# Altium PCB Flat Project.PcbDoc
Units mil, origin at the board's own origin, x right, y up, seen from the top; angles counter-clockwise.
Board outline 6000 x 4000 mil, 2 copper layers (Top Layer, Bottom Layer); 15 components, 15 nets, 132 pads, 6 vias.
Unrouted connection lines stored in the file: 40.
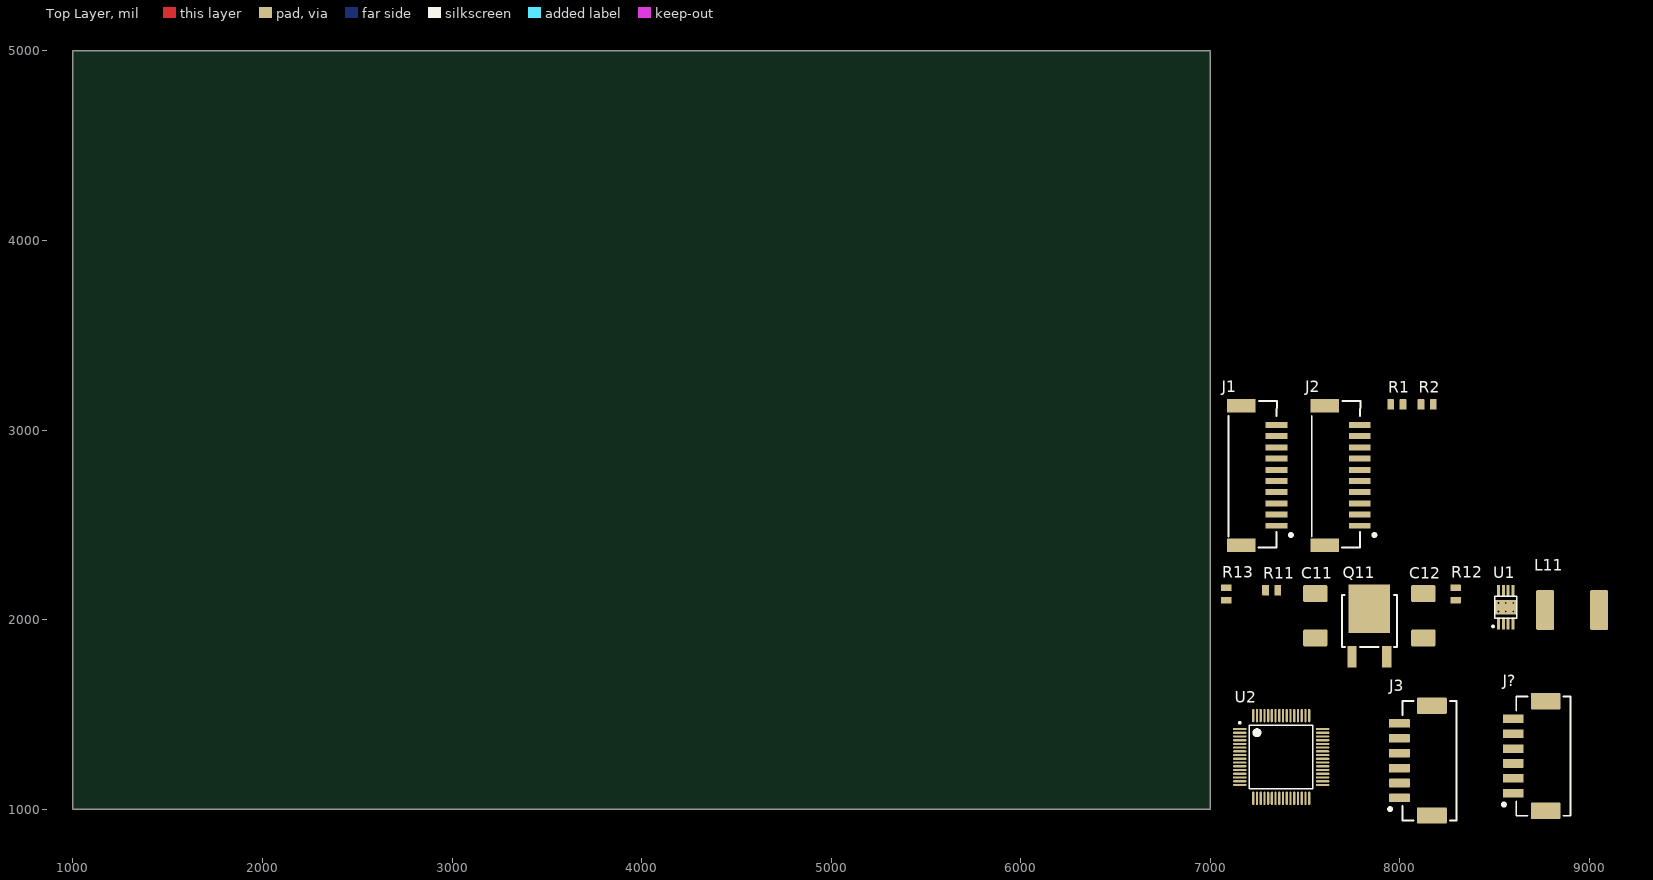
[diagram p0: Top Layer view]
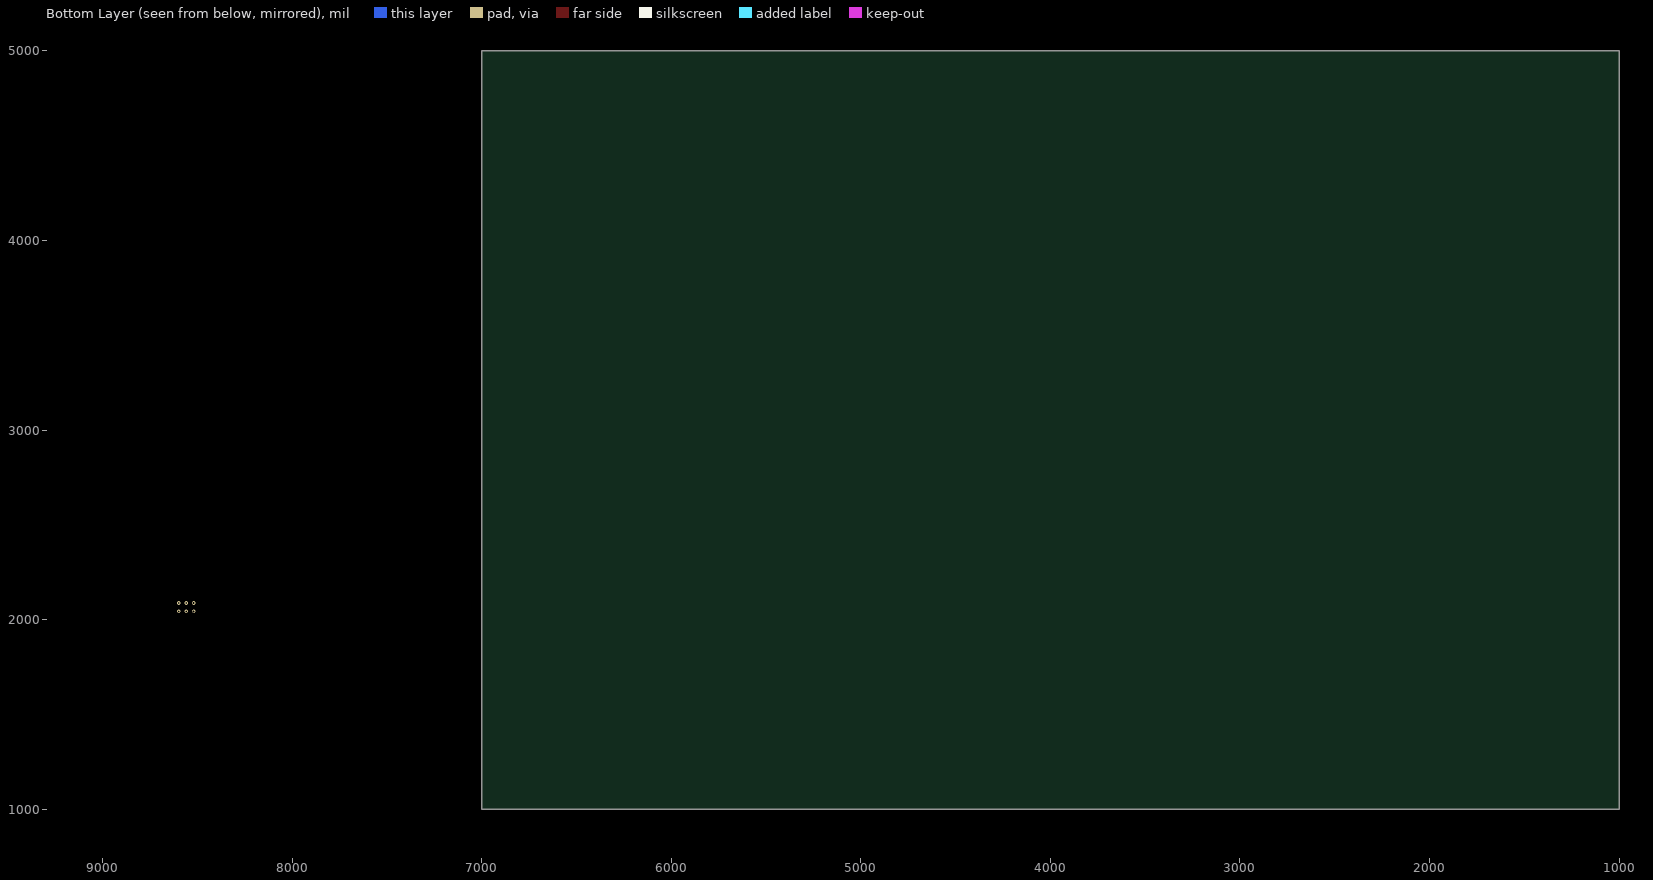
[diagram p1: Bottom Layer view, seen from below]

## Layer stack, top to bottom
Top Solder: solder mask 0.4, Solder Resist, Dk 3.5
Top Layer: signal copper 1.4
Dielectric 1: dielectric 12.6, FR-4, Dk 4.8
Bottom Layer: signal copper 1.4
Bottom Solder: solder mask 0.4, Solder Resist, Dk 3.5

## Board outline
1000,1000 7000,1000 7000,5000 1000,5000

## Design rules (kind name [scope] priority, off if disabled: settings)
Clearance [All] p1: gap=6 ignorepadtopadclearanceinfootprint=FALSE
PolygonConnect [All] p1: connectstyle=Relief reliefconductorwidth=10 reliefentries=4 polygonreliefangle="90 Angle" airgapwidth=10
RoutingVias [All] p1: holewidth=28 width=50 viastyle="Through Hole" minholewidth=28 minwidth=50 maxholewidth=28 maxwidth=50
SolderMaskExpansion [All] p1: expansion=4 istentingtop=FALSE
Width [All] p1: maxlimit=10 minlimit=10 preferedwidth=10
30 further rules are at their usual default settings.

## Classes and differential pairs
net class N000-1_[0..3]: GPIO_BUS0 GPIO_BUS1 GPIO_BUS2 GPIO_BUS3
component class "Net Names 2": J1 J2 J? R1 R2
component class "Net Names 1": C11 C12 J3 L11 Q11 R11 R12 R13 U1
component class Microcontroller: U2

## Components (designator, comment, footprint, x,y, rotation, side; value= is the part's Value field where it differs from the comment)
C11 "CAP_22uF_25V_TANT" CAP2917 7555,2020 r90 top value=22μF
C12 "CAP_22uF_25V_TANT" CAP2917 8125,2020 r90 top value=22μF
J1 "CON_10M_SM_RA" MOLEX-5025851070 7350,2495 r90 top
J2 "CON_10M_SM_RA" MOLEX-5025851070 7790,2495 r90 top
J3 "CON_6M_SM_RA" MOLEX-5024940670 8084.37,1255.63 r90 top
J? "CON_6M_SM_RA" MOLEX-5024940670 8685,1280 r90 top
L11 "IND_2.2uH_14.5A" IND_VISHAY_IHLP3232DZER2R2M11 8910,2050 r0 top
Q11 "PMOS_85V_96A" D-PAK 7840,1930 r0 top
R1 "RES_4.7kΩ_0805_5%" RES0805 7985,3135 r0 top value=4.7kΩ
R2 "RES_4.7kΩ_0805_5%" RES0805 8145,3135 r0 top value=4.7kΩ
R11 "RES_243kΩ_0805_1%" RES0805 7325,2155 r0 top value=243kΩ
R12 "RES_10kΩ_0805_5%" RES0805 8295,2135 r90 top value=10kΩ
R13 "RES_33.2kΩ_0805_1%" RES0805 7085,2135 r90 top value=33.2kΩ
U1 "BUCK_LMR14050SDDAR" 8-VSSOP 8560,2065 r90 top
U2 "STM32F446RET6" STM_LQFP64_N 7375,1275 r0 top

## Footprints (in the part's own frame and the unit in brackets; to place one, negate y for a bottom-side part, rotate by r counter-clockwise, add the part's x,y. Pads: shape width x height; smd on the part's side, far side on the other; paste and mask are expansions set on the pad)
8-VSSOP [mm] "Texas Instruments 8-SO PowerPad"
  rrect15% 1.6x0.4 smd: 1(-2.2,0.975) 2(-2.2,0.325) 3(-2.2,-0.325) 4(-2.2,-0.975) 5(2.2,-0.975) 6(2.2,-0.325) 7(2.2,0.325) 8(2.2,0.975)
  rrect15% 2x3 smd: 9(0,0)
  silkscreen extent -2.69,-1.5 1.45,1.83, body extent -2.47,-1.55 2.47,1.55, height 1.1
CAP2917 [mm]
  rrect15% 2.25x3.25 smd: 1(-2.975,0) 2(2.975,0)
  body extent -3.78,-2.17 3.72,2.13, height 2.8
D-PAK [mm] "TO-252AA"
  rect 5.55x6.5 smd: 1(0,3.2)
  rect 1.25x2.85 smd: 2(-2.325,-3.2) 3(2.325,-3.2)
  silkscreen extent -3.68,-1.91 3.68,5.08, body extent -3.27,-4.08 3.27,5.8, height 2.64
IND_VISHAY_IHLP3232DZER2R2M11 [mil]
  rrect15% 95x210 smd: 1(-142.5,0) 2(142.5,0)
  body extent -169,-153 169,169, height 152
MOLEX-5024940670 [mm] "Molex 5024940670 6 pin 2mm pitch SMD RA connector"
  rrect15% 2.2x4 smd: 0(-7.35,-2.175) 0(7.35,-2.175)
  rrect15% 1.15x2.8 smd: 1(-5,2.175) 2(-3,2.175) 3(-1,2.175) 4(1,2.175) 5(3,2.175) 6(5,2.175)
  silkscreen extent -8,-5.49 8,3.62, body extent -8,-5.49 8,3.01, height 6.91
MOLEX-5025851070 [mm]
  rect 1.8x3.8 smd: 0(-2.6,4.7) 0(16.1,4.7)
  rect 0.8x2.9 smd: 1(0,0) 2(1.5,0) 3(3,0) 4(4.5,0) 5(6,0) 6(7.5,0) 7(9,0) 8(10.5,0) 9(12,0) 10(13.5,0)
  silkscreen extent -2.9,-2.14 16.72,6.45, body extent -2.89,-0.95 16.41,7.55, height 6.26
RES0805 [mm] "Chip Resistor, 2-Leads, Body 2.00x1.25mm, IPC High Density"
  rrect15% 0.9x1.4 smd: 1(-0.825,0) 2(0.825,0)
  body extent -1,-0.62 1,0.63, height 0.61
STM_LQFP64_N [mm] "Thin QFP, 64-Leads, Body 10x10mm, Pitch 0.5mm, IPC Medium Density"
  oval 1.8x0.3 smd mask+0.05: 1(-5.55,3.75) 2(-5.55,3.25) 3(-5.55,2.75) 4(-5.55,2.25) 5(-5.55,1.75) 6(-5.55,1.25) 7(-5.55,0.75) 8(-5.55,0.25) 9(-5.55,-0.25) 10(-5.55,-0.75) 11(-5.55,-1.25) 12(-5.55,-1.75) 13(-5.55,-2.25) 14(-5.55,-2.75) 15(-5.55,-3.25) 16(-5.55,-3.75) 33(5.55,-3.75) 34(5.55,-3.25) 35(5.55,-2.75) 36(5.55,-2.25) 37(5.55,-1.75) 38(5.55,-1.25) 39(5.55,-0.75) 40(5.55,-0.25) 41(5.55,0.25) 42(5.55,0.75) 43(5.55,1.25) 44(5.55,1.75) 45(5.55,2.25) 46(5.55,2.75) 47(5.55,3.25) 48(5.55,3.75)
  oval 0.3x1.8 smd mask+0.05: 17(-3.75,-5.55) 18(-3.25,-5.55) 19(-2.75,-5.55) 20(-2.25,-5.55) 21(-1.75,-5.55) 22(-1.25,-5.55) 23(-0.75,-5.55) 24(-0.25,-5.55) 25(0.25,-5.55) 26(0.75,-5.55) 27(1.25,-5.55) 28(1.75,-5.55) 29(2.25,-5.55) 30(2.75,-5.55) 31(3.25,-5.55) 32(3.75,-5.55) 49(3.75,5.55) 50(3.25,5.55) 51(2.75,5.55) 52(2.25,5.55) 53(1.75,5.55) 54(1.25,5.55) 55(0.75,5.55) 56(0.25,5.55) 57(-0.25,5.55) 58(-0.75,5.55) 59(-1.25,5.55) 60(-1.75,5.55) 61(-2.25,5.55) 62(-2.75,5.55) 63(-3.25,5.55) 64(-3.75,5.55)
  silkscreen extent -5.67,-4.25 4.25,4.7, body extent -6,-5.99 6,6.01, height 1.56

## Part data
C11 C12: "CAP TANT 22UF 20% 25V 2917", Manufacturer 1="AVX Corporation", Manufacturer Part Number 1=F971A106MBAHT3, Supplier Part Number 1=TPSD226M025R0100, Voltage Rating=25V, Supplier 1="Arrow Electronics"
J1 J2: "CONN HEADER SMD RIGHT ANGLE 1.5 MM PITCH", Current Rating=2A, Manufacturer 1=Molex, Manufacturer Part Number 1=502585-1070, Supplier Part Number 1=WM14472CT-ND, Voltage Rating=100V, Family=CLIK-Mate, Orientation="Right Angle", Pitch=1.5mm, Supplier 1=Digi-Key
J3 J?: "CONN HEADER SMD RIGHT ANGLE 2MM PITCH", Current Rating=3A, Manufacturer 1=Molex, Manufacturer Part Number 1=502494-0670, Supplier Part Number 1=WM2283CT-ND, Voltage Rating=250V, Orientation="Right Angle", Pitch=2mm, Supplier 1=Digi-Key
L11: "INDUCTOR 2.2UH 14.5A 9.41 MOHM", Current Rating=14.5A, DC Resistance (DCR)=9.41mOhm, Inductance=2.2μH, Inductance Tolerance=20%, Manufacturer 1="Vishay Dale", Manufacturer Part Number 1=IHLP3232DZER2R2M11, Saturation Current=10.2A, Supplier Part Number 1=541-1350-1-ND, Mounting Type=SMD, Supplier 1=Digi-Key
Q11: "MOSFET P-CH 85V 96A TO263", Manufacturer 1=IXYS, Manufacturer Part Number 1=IXTA96P085T-TRL, Package/Footprint=TO-263AA, Supplier Part Number 1=IXTA96P085T-TRLCT-ND, Id=96A, Mounting Type=SMD, Supplier 1=Digi-Key, Vdss=85V, Verified=No, Vgs (Max)=±15V
R1 R2: "RES 4.7K OHM 5% 1/8W 0805", LCSC Part #=C17673, Manufacturer 1=Yageo, Manufacturer Part Number 1=RC0805JR-074K7L, Package=0805, Supplier Part Number 1=311-4.7KARCT-ND, Mounting Type=SMD, Supplier 1=Digi-Key
R11: "RES 243K OHM 1% 1/8W 0805", Manufacturer 1="Stackpole Electronics Inc", Manufacturer Part Number 1=RMCF0805FT243K, Package/Footprint=0805, Supplier Part Number 1=RMCF0805FT243KCT-ND, Mounting Type=SMD, Supplier 1=Digi-Key
R12: "RES 10K OHM 5% 1/8W 0805", LCSC Part #=C17414, Manufacturer 1="Panasonic Electronic Components", Manufacturer Part Number 1=ERJ-6GEYJ103V, Package/Footprint=0805, Supplier Part Number 1=P10KACT-ND, Mounting Type=SMD, Supplier 1=Digi-Key
R13: "RES 33.2K OHM 1% 1/8W 0805", Manufacturer 1="Stackpole Electronics Inc", Manufacturer Part Number 1=RMCF0805FT33K2, Package/Footprint=0805, Supplier Part Number 1=RMCF0805FT33K2CT-ND, Mounting Type=SMD, Supplier 1=Digi-Key
U1: library part BUCK_LM5085, "IC REG CTRLR BUCK 8VSSOP", Manufacturer 1="Texas Instruments", Manufacturer Part Number 1=LM5085MME/NOPB, Package/Footprint=8-VSSON, Supplier Part Number 1=LM5085MME/NOPBCT-ND, Mounting Type=SMD, Output Configuration=Positive, Output Type="Transistor Driver", Supplier 1=Digi-Key
U2: "IC MCU 32BIT 512KB FLASH 64LQFP", Manufacturer 1=STMicroelectronics, Manufacturer Part Number 1=LF80CDT-TR, Supplier Part Number 1=497-15376-ND, Supplier 1=Digi-Key

## Via types
v1: diameter 20, hole 10, Top Layer to Bottom Layer, 6 vias

## Nets (pads, with @x,y where several pads share a name; then routed paths per layer and width w, separated by ;. In a path a pad name is that pad's centre, name@x,y a point inside that pad or via, vN(x,y) a via of type N, cw(c..) or ccw(c..) an arc to the next point about the centre after c; other vN are vias at no path point)
3V3: C12.1 L11.2 R1.2 R2.2 R12.2
12V: C11.1 U1.8
GND: C11.2 C12.2 J1.0 J1.9 J1.10 J2.0 J2.1 J2.10 J3.5 J3.6 J?.5 J?.6 Q11.3 R11.1 R13.1 U1.1 U1.4 U1.9
  other v1: 8520.63,2043.35 8560,2043.35 8599.37,2043.35 8520.63,2086.65 8560,2086.65 8599.37,2086.65
GPIO_BUS0: J3.1 J?.1
GPIO_BUS1: J3.2 J?.2
GPIO_BUS2: J3.3 J?.3
GPIO_BUS3: J3.4 J?.4
I2C.SCL: J1.2 J2.3 U2.22
I2C.SDA: J1.1 J2.4 U2.21
NetJ1_7: J1.7 U2.15
NetJ1_8: J1.8 U2.16
NetQ11_2: Q11.2 U1.6
NetR12_1: R12.1 R13.2 U1.3
RT: R11.2 U1.2
SW: L11.1 Q11.1 U1.7
pads on no net: J1.3 J1.4 J1.5 J1.6 J2.2 J2.5 J2.6 J2.7 J2.8 J2.9 J3.0 J?.0 R1.1 R2.1 U1.5 U2.1 U2.2 U2.3 U2.4 U2.5 U2.6 U2.7 U2.8 U2.9 U2.10 U2.11 U2.12 U2.13 U2.14 U2.17 U2.18 U2.19 U2.20 U2.23 U2.24 U2.25 U2.26 U2.27 U2.28 U2.29 U2.30 U2.31 U2.32 U2.33 U2.34 U2.35 U2.36 U2.37 U2.38 U2.39 U2.40 U2.41 U2.42 U2.43 U2.44 U2.45 U2.46 U2.47 U2.48 U2.49 U2.50 U2.51 U2.52 U2.53 U2.54 U2.55 U2.56 U2.57 U2.58 U2.59 U2.60 U2.61 U2.62 U2.63 U2.64